# Altium PCB 20bit_40MS_ADC_DIOT.PcbDoc (part 2 of 8)
Units mm, origin at the board's own origin, x right, y up, seen from the top; angles counter-clockwise.
Board outline 222.63 x 100.1 mm, 6 copper layers (L1, L2, L3, L4, L5, L6), stack 2.522 mm thick; 616 components, 374 nets, 2097 pads, 984 vias.
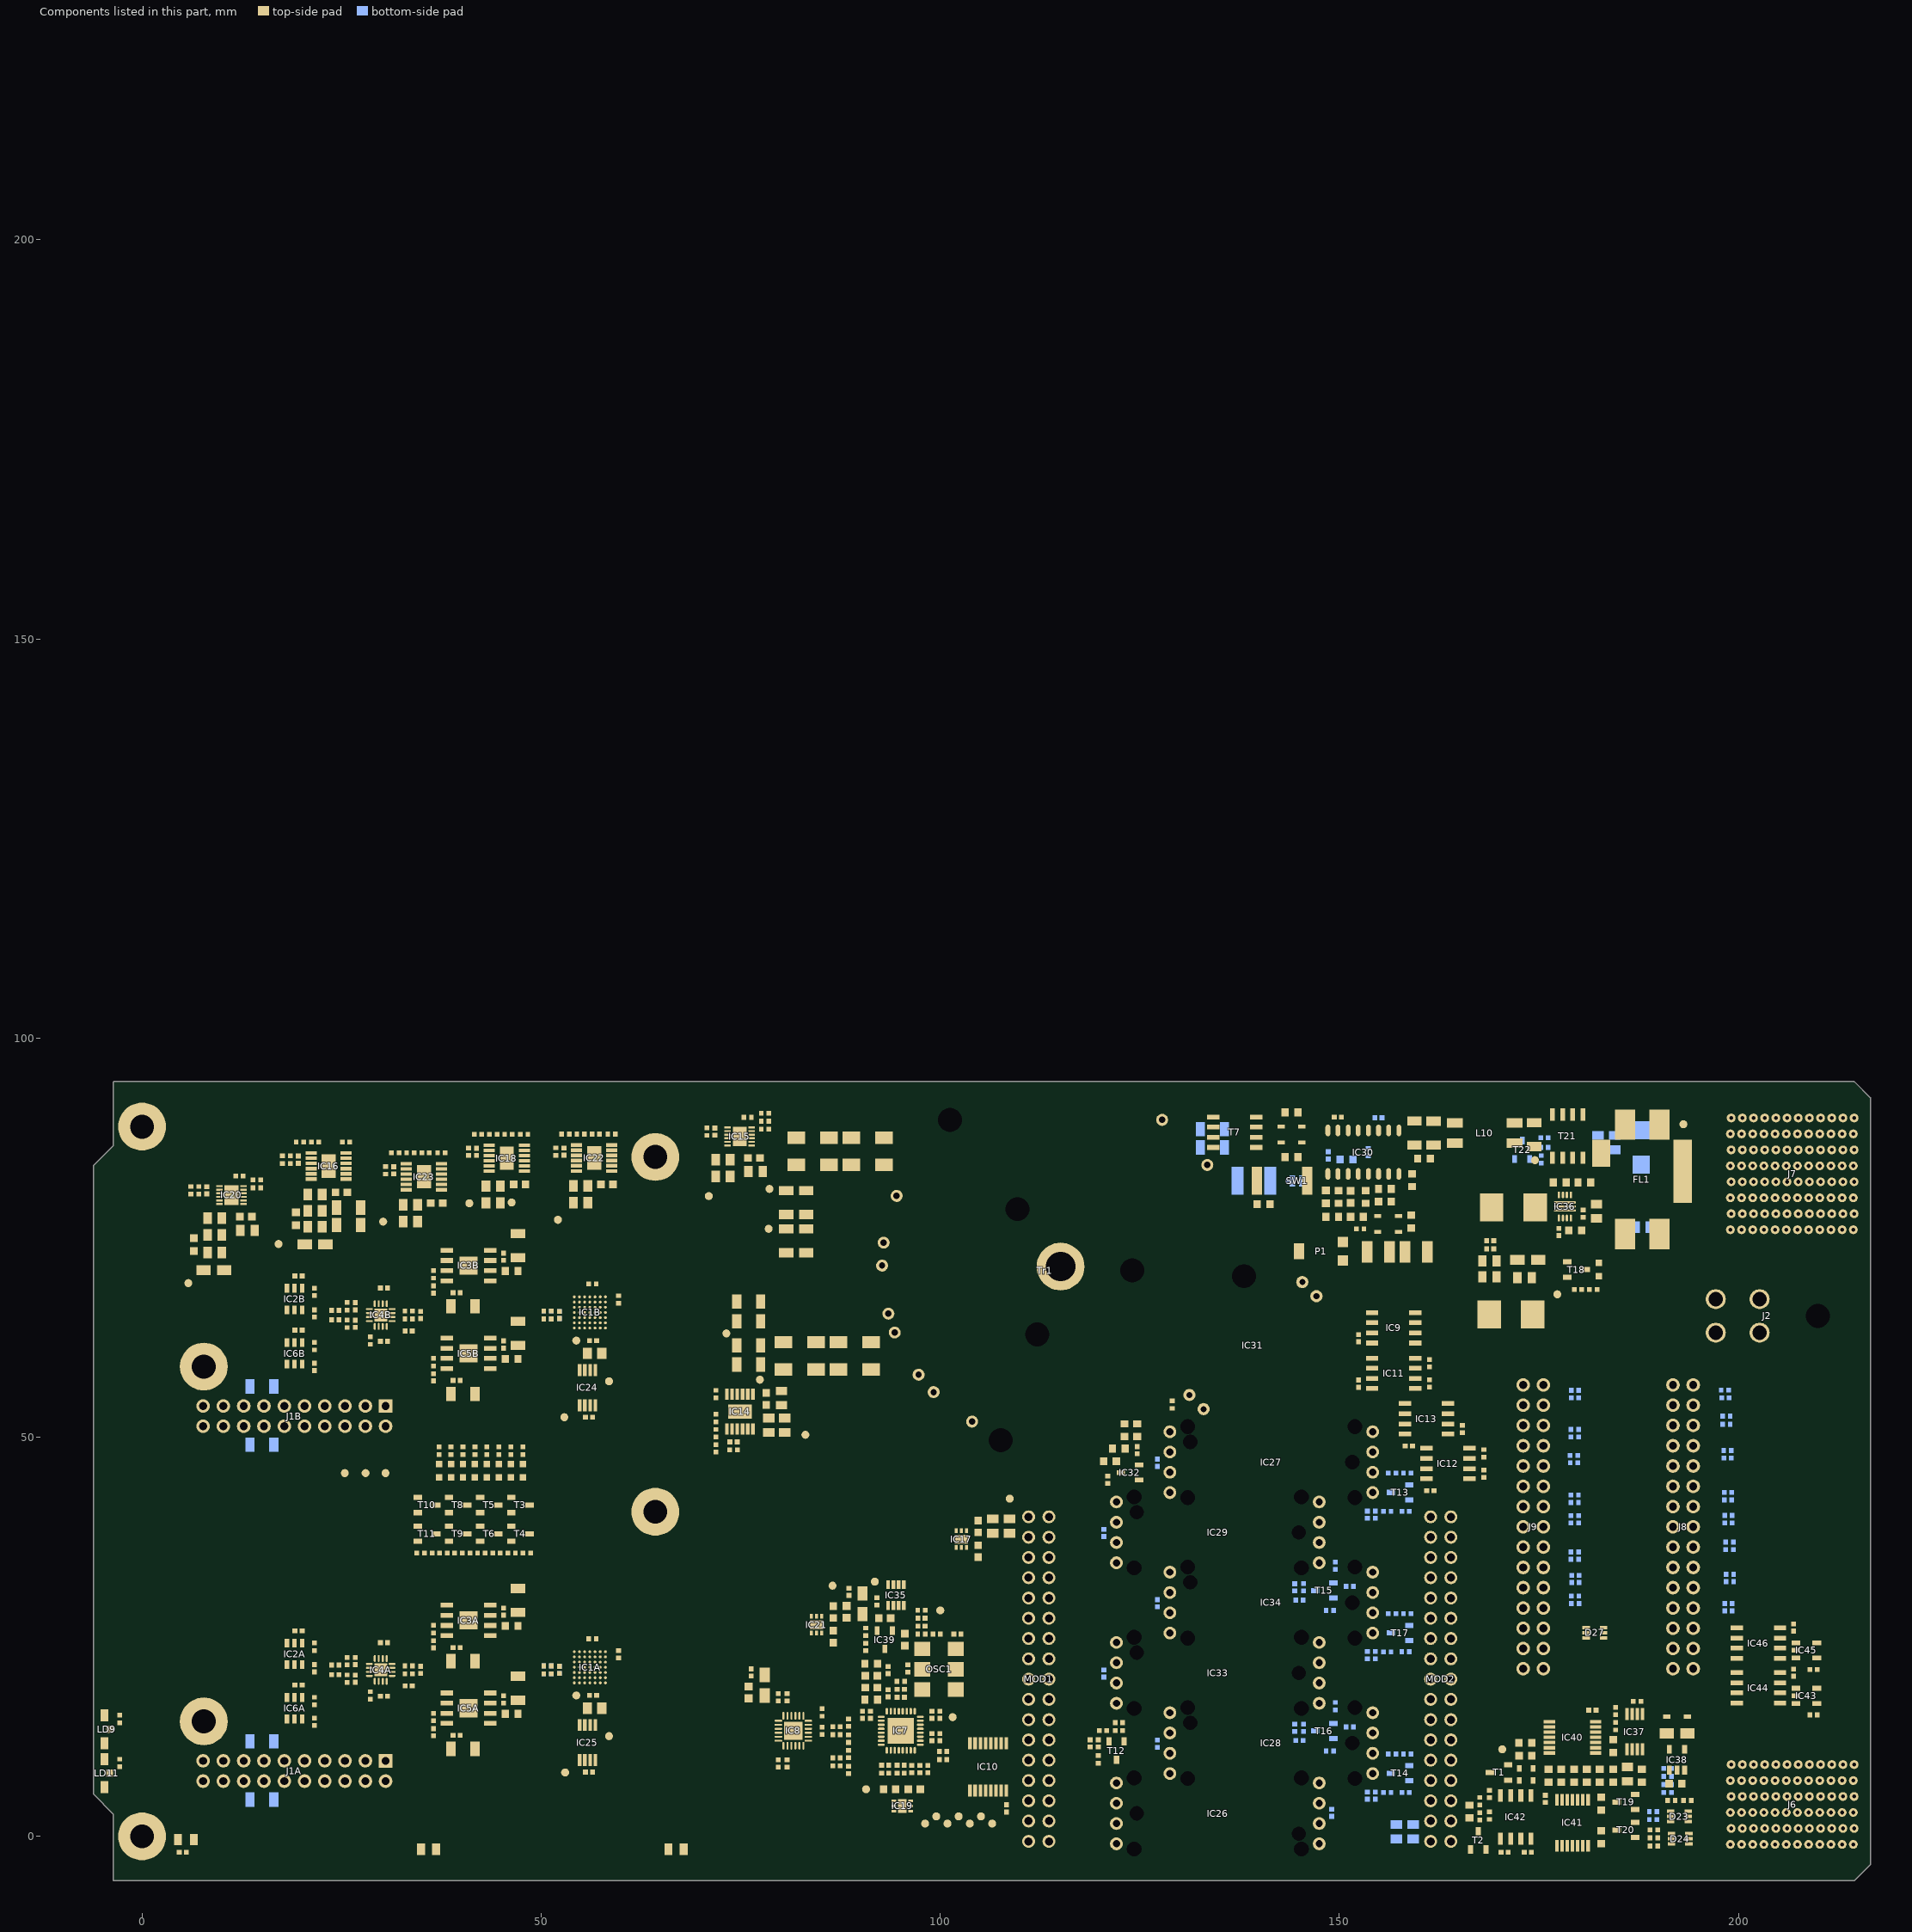
[diagram p6: the components of this part, seen from the top]

## Footprints (in the part's own frame and the unit in brackets; to place one, negate y for a bottom-side part, rotate by r counter-clockwise, add the part's x,y. Pads: shape width x height; smd on the part's side, far side on the other; paste and mask are expansions set on the pad)
3M_N2530-6002RB [mm] "30 Contacts - Straight .100\" x .100\" Low Profile Four-Wall Header"
  round 1.7 hole 1: 1(-17.78,-1.27) 2(-17.78,1.27) 3(-15.24,-1.27) 4(-15.24,1.27) 5(-12.7,-1.27) 6(-12.7,1.27) 7(-10.16,-1.27) 8(-10.16,1.27) 9(-7.62,-1.27) 10(-7.62,1.27) 11(-5.08,-1.27) 12(-5.08,1.27) 13(-2.54,-1.27) 14(-2.54,1.27) 15(0,-1.27) 16(0,1.27) 17(2.54,-1.27) 18(2.54,1.27) 19(5.08,-1.27) 20(5.08,1.27) 21(7.62,-1.27) 22(7.62,1.27) 23(10.16,-1.27) 24(10.16,1.27) 25(12.7,-1.27) 26(12.7,1.27) 27(15.24,-1.27) 28(15.24,1.27) 29(17.78,-1.27) 30(17.78,1.27)
  silkscreen extent -22.71,-4.85 22.71,4.52, body extent -22.71,-4.11 22.71,4.52, height 9.91
AMPHENOL_10052825-101LF [mm] "72 Contacts, 2mm Pitch, 6 Columns, 4 Pairs per Column, 4 Walls, Right Angle Header"
  round 1.1 hole 0.5: A1(-5,-7.65) A2(-3,-7.75) A3(-1,-7.65) A4(1,-7.75) A5(3,-7.65) A6(5,-7.75) B1(-5,-6.25) B2(-3,-6.35) B3(-1,-6.25) B4(1,-6.35) B5(3,-6.25) B6(5,-6.35) C1(-5,-4.85) C2(-3,-4.95) C3(-1,-4.85) C4(1,-4.95) C5(3,-4.85) C6(5,-4.95) D1(-5,-3.45) D2(-3,-3.55) D3(-1,-3.45) D4(1,-3.55) D5(3,-3.45) D6(5,-3.55) E1(-5,-2.05) E2(-3,-2.15) E3(-1,-2.05) E4(1,-2.15) E5(3,-2.05) E6(5,-2.15) F1(-5,-0.65) F2(-3,-0.75) F3(-1,-0.65) F4(1,-0.75) F5(3,-0.65) F6(5,-0.75) G1(-5,0.75) G2(-3,0.65) G3(-1,0.75) G4(1,0.65) G5(3,0.75) G6(5,0.65) H1(-5,2.15) H2(-3,2.05) H3(-1,2.15) H4(1,2.05) H5(3,2.15) H6(5,2.05) I1(-5,3.55) I2(-3,3.45) I3(-1,3.55) I4(1,3.45) I5(3,3.55) I6(5,3.45) J1(-5,4.95) J2(-3,4.85) J3(-1,4.95) J4(1,4.85) J5(3,4.95) J6(5,4.85) K1(-5,6.35) K2(-3,6.25) K3(-1,6.35) K4(1,6.25) K5(3,6.35) K6(5,6.25) L1(-5,7.75) L2(-3,7.65) L3(-1,7.75) L4(1,7.65) L5(3,7.75) L6(5,7.65)
  silkscreen extent -6.95,-9.45 6.95,11.85, body extent -6.95,-21.95 6.95,11.85, height 15.25
AMPHENOL_10052838-101LF [mm] "96 Contacts, 2mm Pitch, 8 Columns, 4 Pairs per Column, 4 Walls, Right Angle Header"
  round 1.1 hole 0.5: A1(-7,-7.65) A2(-5,-7.75) A3(-3,-7.65) A4(-1,-7.75) A5(1,-7.65) A6(3,-7.75) A7(5,-7.65) A8(7,-7.75) B1(-7,-6.25) B2(-5,-6.35) B3(-3,-6.25) B4(-1,-6.35) B5(1,-6.25) B6(3,-6.35) B7(5,-6.25) B8(7,-6.35) C1(-7,-4.85) C2(-5,-4.95) C3(-3,-4.85) C4(-1,-4.95) C5(1,-4.85) C6(3,-4.95) C7(5,-4.85) C8(7,-4.95) D1(-7,-3.45) D2(-5,-3.55) D3(-3,-3.45) D4(-1,-3.55) D5(1,-3.45) D6(3,-3.55) D7(5,-3.45) D8(7,-3.55) E1(-7,-2.05) E2(-5,-2.15) E3(-3,-2.05) E4(-1,-2.15) E5(1,-2.05) E6(3,-2.15) E7(5,-2.05) E8(7,-2.15) F1(-7,-0.65) F2(-5,-0.75) F3(-3,-0.65) F4(-1,-0.75) F5(1,-0.65) F6(3,-0.75) F7(5,-0.65) F8(7,-0.75) G1(-7,0.75) G2(-5,0.65) G3(-3,0.75) G4(-1,0.65) G5(1,0.75) G6(3,0.65) G7(5,0.75) G8(7,0.65) H1(-7,2.15) H2(-5,2.05) H3(-3,2.15) H4(-1,2.05) H5(1,2.15) H6(3,2.05) H7(5,2.15) H8(7,2.05) I1(-7,3.55) I2(-5,3.45) I3(-3,3.55) I4(-1,3.45) I5(1,3.55) I6(3,3.45) I7(5,3.55) I8(7,3.45) J1(-7,4.95) J2(-5,4.85) J3(-3,4.95) J4(-1,4.85) J5(1,4.95) J6(3,4.85) J7(5,4.95) J8(7,4.85) K1(-7,6.35) K2(-5,6.25) K3(-3,6.35) K4(-1,6.25) K5(1,6.35) K6(3,6.25) K7(5,6.35) K8(7,6.25) L1(-7,7.75) L2(-5,7.65) L3(-3,7.75) L4(-1,7.65) L5(1,7.75) L6(3,7.65) L7(5,7.75) L8(7,7.65)
  silkscreen extent -8.95,-9.45 8.95,11.85, body extent -8.95,-21.95 8.95,11.85, height 15.25
BGA49C65P7X7_500X500X138 [mm] "BGA, 49-Leads, Body 5.00x5.00mmx1.38mm, Pitch 0.65mm"
  round 0.35 smd: A1(-1.95,1.95) A2(-1.3,1.95) A3(-0.65,1.95) A4(0,1.95) A5(0.65,1.95) A6(1.3,1.95) A7(1.95,1.95) B1(-1.95,1.3) B2(-1.3,1.3) B3(-0.65,1.3) B4(0,1.3) B5(0.65,1.3) B6(1.3,1.3) B7(1.95,1.3) C1(-1.95,0.65) C2(-1.3,0.65) C3(-0.65,0.65) C4(0,0.65) C5(0.65,0.65) C6(1.3,0.65) C7(1.95,0.65) D1(-1.95,0) D2(-1.3,0) D3(-0.65,0) D4(0,0) D5(0.65,0) D6(1.3,0) D7(1.95,0) E1(-1.95,-0.65) E2(-1.3,-0.65) E3(-0.65,-0.65) E4(0,-0.65) E5(0.65,-0.65) E6(1.3,-0.65) E7(1.95,-0.65) F1(-1.95,-1.3) F2(-1.3,-1.3) F3(-0.65,-1.3) F4(0,-1.3) F5(0.65,-1.3) F6(1.3,-1.3) F7(1.95,-1.3) G1(-1.95,-1.95) G2(-1.3,-1.95) G3(-0.65,-1.95) G4(0,-1.95) G5(0.65,-1.95) G6(1.3,-1.95) G7(1.95,-1.95)
  silkscreen extent -3.27,-2.5 2.5,2.5, body extent -2.5,-2.5 2.5,2.5, height 1.38
BROADCOM_AFBR-390525RZ [mm] "BROADCOM AFBR-390525RZ Case, Body 30.46mm L X 10.16mm W X 6.7mm H"
  round 1.6 hole 0.9: 1(-12.7,3.81) 2(-12.7,1.27) 3(-12.7,-1.27) 4(-12.7,-3.81) 5(12.7,3.81) 6(12.7,1.27) 7(12.7,-1.27) 8(12.7,-3.81)
  round 1 hole 1.85 unplated mask+0.425: 9(-10.47,4.45) 11(-10.47,-4.45) 12(10.47,4.45) 14(10.47,-4.45)
  round 1 hole 1.8 unplated mask+0.4: 10(-10.16,0) 13(10.16,-2.54)
  silkscreen extent -15.23,-5.08 15.23,5.08, body extent -15.23,-5.08 15.23,5.08, height 6.7
C100 [mm] "1mm Diameter SMD Pad"
  round 1 smd paste-0.5: 1(0,0)
CAPC1005X55N [mm] "Capacitor, Non-Polarized, Chip; 1.00mm L X 0.50mm W X 0.70mm H, IPC Medium Density"
  rect 0.62x0.62 smd: 1(-0.45,0) 2(0.45,0)
  body extent -0.52,-0.27 0.53,0.28, height 0.55
CAPC1608X87N [mm] "Chip Capacitor, Body 1.6x0.8mm IPC Medium Density"
  rect 0.95x1 smd: 1(-0.8,0) 2(0.8,0)
  body extent -0.87,-0.47 0.88,0.48, height 0.87
CAPC1608X90N [mm] "Chip Capacitor, Body 1.6x0.8mm IPC Medium Density"
  rect 0.95x0.95 smd: 1(-0.75,0) 2(0.75,0)
  body extent -0.85,-0.45 0.85,0.45, height 0.9
CAPC2012X95N [mm] "Chip Capacitor, Body 2.0x1.25mm, IPC Medium Density"
  rect 1.1x1.45 smd: 1(-0.9,0) 2(0.9,0)
  body extent -1.05,-0.67 1.05,0.68, height 0.95
CAPC2012X135N [mm] "Chip Capacitor, Body 2.0x1.25mm, IPC Medium Density"
  rect 1.05x1.4 smd: 1(-0.9,0) 2(0.9,0)
  silkscreen extent 0,-0.58 0,0.58, body extent -1.05,-0.67 1.05,0.68, height 1.25
CAPC2012X140N [mm] "Chip Capacitor, Body 2.0x1.25mm, IPC Medium Density"
  rect 1.15x1.45 smd: 1(-0.9,0) 2(0.9,0)
  body extent -1.05,-0.67 1.05,0.68, height 1.3
CAPC3216X180N [mm] "Chip Capacitor, Body 3.2x1.6mm, IPC Medium Density"
  rect 1.15x1.8 smd: 1(-1.5,0) 2(1.5,0)
  silkscreen extent -0.55,-0.8 0.55,0.8, body extent -1.7,-0.9 1.7,0.9, height 1.8
CAPC3225X200N [mm] "Chip Capacitor, Body 3.2x2.5mm, IPC Medium Density"
  rect 1.35x2.7 smd: 1(-1.4,0) 2(1.4,0)
  silkscreen extent -0.35,-1.25 0.35,1.25, body extent -1.7,-1.35 1.5,1.35, height 2
CAPC4532X250N [mm] "Chip Capacitor, 2-Leads, Body 4.5x3.2mm, IPC Medium Density"
  rect 1.5x3.5 smd: 1(-2.05,0) 2(2.05,0)
  silkscreen extent -0.95,-1.6 0.95,1.6, body extent -2.37,-1.7 2.38,1.7, height 2.5
CAPMP3216X180N [mm] "Capacitor, Polarized, Molded  Body 3.2x1.6mm, IPC Medium Density"
  rect 1.8x1.25 smd: 1(-1.3,0) 2(1.3,0)
  silkscreen extent 0,-0.7 0,0.7, body extent -1.7,-0.9 1.7,0.9, height 1.6
DIOM5127X229N [mm] "DO-214-AC/SMA Diode, Molded Body; 5.10mm L X 2.67mm W X 2.29mm H, IPC Medium Density"
  rect 2.2x1.55 smd: 1(-2.05,0) 2(2.05,0)
  silkscreen extent -3.42,-1.4 2.65,1.45, body extent -2.67,-1.45 2.68,1.45, height 2.29
DIOM5336X265N [mm] "DO-214-AA/SMB Diode, Molded Body; 5.34mm L X 3.625mm W X 2.65mm H, IPC Medium Density"
  rect 2.3x2.15 smd: 1(-2.15,0) 2(2.15,0)
  silkscreen extent -3.92,-1.8 2.65,1.8, body extent -2.7,-1.95 2.7,1.95, height 2.4
FIL_MURATA_BNX02 [mm] "Block Type EMIFIL LC Combined Type, BNX02* Series"
  rect 3.8x2.5 smd: 1(-6.85,2.1) 2(6.85,2.1) 3(-6.85,-2.2) 4(6.85,-2.2)
  rect 7.9x2.3 smd: 4(1,-5.1)
  rect 3.4x2.3 smd: 4(3.25,5.1)
  silkscreen extent -5.95,-4.45 7.77,5.05, body extent -6.05,-4.55 6.05,4.55, height 3.1
IND_WURTH_WE-LHMI_7050 [mm] "SMD Power Inductor (We-LHMI Series), Body 7.6x6.9mm"
  rect 2.95x3.5 smd: 1(-2.725,0) 2(2.725,0)
  L1 keep-out region: 1.1,-3.45 1.1,3.45 -1.1,3.45 -1.1,-3.45
  silkscreen extent -3.8,-3.45 3.8,3.45, body extent -3.65,-3.3 3.65,3.3, height 4.8
IND_WURTH_WE-SL2 [mm] "Common Mode SMD Line Filter WE-SL2"
  rect 2x1.2 smd: 1(-3.75,1.27) 2(-3.75,-1.27) 3(3.75,-1.27) 4(3.75,1.27)
  silkscreen extent -4.75,-3.15 4.75,3.15, body extent -4.75,-3.15 4.75,3.15, height 5.3
INDC1005X55N [mm] "Chip Inductor, 2-Leads, EIA 0402, Metric 1005, Body 1x0.5mm, 0402IPC Medium Density"
  rect 0.6x0.62 smd: 1(-0.46,0) 2(0.46,0)
  body extent -0.52,-0.27 0.53,0.28, height 0.55
INDC1608X65N [mm] "Chip Inductor, 2-Leads, EIA 0603, Metric 1608, Body 1.6x0.8mm, IPC Medium Density"
  rect 1x1 smd: 1(-0.75,0) 2(0.75,0)
  body extent -0.87,-0.47 0.88,0.48, height 0.65
INDC1608X95N [mm] "Chip Inductor, 2-Leads, EIA 0603, Metric 1608, Body 1.6x0.8mm, IPC Medium Density"
  rect 0.95x1 smd: 1(-0.8,0) 2(0.8,0)
  body extent -0.87,-0.47 0.88,0.48, height 0.95
JUMPSMD0805_G50 [mm] "2 SMD Pads for Bound by Solder Drop - Equivalent Size 0805 - Gap 0.5mm"
  rect 0.475x0.45 smd paste-0.225: 1(-1.188,0) 2(1.188,0)
  rect 0.7x1.4 smd paste-0.35: 1(-0.6,0) 2(0.6,0)
  L1 region: 0.25,-0.7 0.95,-0.7 1.425,-0.225 1.425,0.225 0.95,0.7 0.25,0.7
  L1 region: -0.25,0.7 -0.95,0.7 -1.425,0.225 -1.425,-0.225 -0.95,-0.7 -0.25,-0.7
  L1 keep-out region: -0.05,0.7 0.05,0.7 0.05,-0.7 -0.05,-0.7
LED_AVAGO_HSMC-C110 [mm] "Red Chip LED, 2-Leads, Body 3.3x1.6mm, Side Emitting Package"
  rect 1.5x1 smd: 1(-1.75,0) 2(1.75,0)
  rect 0.9x0.9 smd: 3(0,-0.65)
  silkscreen extent -1.87,-1.28 0.83,1.02, body extent -1.65,-0.3 1.65,1.3, height 1
LED_AVAGO_HSME-C110 [mm] "Green Chip LED, 2-Leads, Body 3.3x1.6mm, Side Emitting Package"
  rect 1.5x1 smd: 1(-1.75,0) 2(1.75,0)
  rect 0.9x0.9 smd: 3(0,-0.65)
  silkscreen extent -1.87,-1.28 0.83,1.02, body extent -1.65,-0.3 1.65,1.3, height 1
LED_KINGBRIGHT_KP-1608CGCK [mm] "SMT Green LED, Case 0603, Body L 1.60mm x W 0.80mm x H 1.10mm"
  rect 0.8x0.8 smd: 1(-0.825,0) 2(0.825,0)
  silkscreen extent -1.82,-0.13 -1.6,0.12, body extent -0.8,-0.4 0.8,0.4, height 1.1
MOLEX_39-30-0040 [mm] "4.20mm (.165\") Pitch Mini-Fit Jr. Header, Dual Row, Right Angle with Snap-in Plastic Peg PCB Lock, 4 Circuits"
  round 2.5 hole 1.8: 1(-2.1,2.75) 2(2.1,2.75) 3(-2.1,-2.75) 4(2.1,-2.75)
  round 1 hole 3 unplated mask+1: 5(0,10.05)
  silkscreen extent -5.2,-1.24 4.8,16.28, body extent -5.2,-3.28 4.8,16.65, height 11.4
MTG300 [mm] "Non Plated Through Hole: Hole Dia.=3.0mm"
  round 0.5 hole 3 unplated mask+1.25: 1(0,0)
MTG300_600 [mm] "Plated Through Hole: Hole Dia.=3.0mm Pad Dia.=6.0mm"
  round 6 hole 3: 1(0,0)
OPI1264C [mil] "Low‐cost plastic housing"
  round 60 hole 30: 1(393.7,-49.21) 2(393.7,49.21) 3(-393.7,49.21) 4(-393.7,-49.21)
  silkscreen extent -350,-128 350,128, body extent -403,-129 404,130, height 230
OPTOISOLATOR_MODULE [mm]
  round 1.62 hole 1.02: 1(40.64,0) 2(40.64,2.54) 3(38.1,0) 4(38.1,2.54) 5(35.56,0) 6(35.56,2.54) 7(33.02,0) 8(33.02,2.54) 9(30.48,0) 10(30.48,2.54) 11(27.94,0) 12(27.94,2.54) 13(25.4,0) 14(25.4,2.54) 15(22.86,0) 16(22.86,2.54) 17(20.32,0) 18(20.32,2.54) 19(17.78,0) 20(17.78,2.54) 21(15.24,0) 22(15.24,2.54) 23(12.7,0) 24(12.7,2.54) 25(10.16,0) 26(10.16,2.54) 27(7.62,0) 28(7.62,2.54) 29(5.08,0) 30(5.08,2.54) 31(2.54,0) 32(2.54,2.54) 33(0,0) 34(0,2.54)
  body extent -1.28,-1.25 41.92,10.79, height 23.96
OSC_PERICOM_FRETHE025 [mm] "SMD Oscillator, side convave, 6 pins, 5.00x7.00mm"
  rect 2x1.8 smd: 1(-2.1,2.54) 2(-2.1,0) 3(-2.1,-2.54) 4(2.1,-2.54) 5(2.1,0) 6(2.1,2.54)
  silkscreen extent -0.75,-3.58 0.75,3.58, body extent -2.57,-3.57 2.58,3.58, height 1.55
QFN50P300X300X80_HS-17N [mm] "QFN, 16-Leads, Body 3.00x3.00mm, Pitch 0.50mm, Thermal Pad 1.60x1.60mm, IPC Medium Density"
  oval 0.85x0.25 smd: 1(-1.425,0.75) 2(-1.425,0.25) 3(-1.425,-0.25) 4(-1.425,-0.75) 9(1.425,-0.75) 10(1.425,-0.25) 11(1.425,0.25) 12(1.425,0.75)
  oval 0.25x0.85 smd: 5(-0.75,-1.425) 6(-0.25,-1.425) 7(0.25,-1.425) 8(0.75,-1.425) 13(0.75,1.425) 14(0.25,1.425) 15(-0.25,1.425) 16(-0.75,1.425)
  rect 1.6x1.6 smd: 17(0,0)
  silkscreen extent -2.47,-1.7 1.7,1.7, body extent -1.63,-1.63 1.63,1.63, height 0.8
QFN50P400X400X80_HS-25N [mm] "QFN, 24-Leads, Body 4.00x4.00mm, Pitch 0.50mm, Thermal Pad 2.30x2.30mm, IPC Medium Density"
  oval 0.95x0.25 smd: 1(-1.875,1.25) 2(-1.875,0.75) 3(-1.875,0.25) 4(-1.875,-0.25) 5(-1.875,-0.75) 6(-1.875,-1.25) 13(1.875,-1.25) 14(1.875,-0.75) 15(1.875,-0.25) 16(1.875,0.25) 17(1.875,0.75) 18(1.875,1.25)
  oval 0.25x0.95 smd: 7(-1.25,-1.875) 8(-0.75,-1.875) 9(-0.25,-1.875) 10(0.25,-1.875) 11(0.75,-1.875) 12(1.25,-1.875) 19(1.25,1.875) 20(0.75,1.875) 21(0.25,1.875) 22(-0.25,1.875) 23(-0.75,1.875) 24(-1.25,1.875)
  rect 2.3x2.3 smd: 25(0,0)
  silkscreen extent -2.97,-2.2 2.2,2.2, body extent -2.07,-2.07 2.07,2.07, height 0.8
QFN50P500X500X80-33N-S325 [mm] "QFN, 0.50mm Pitch, Square; 8 Pin X 8 Pin, 5mm X 5mm X 0.8mm H Body (w/Thermal Tab 3.25 X 3.25mm),  IPC Medium Density"
  oval 0.85x0.3 smd: 1(-2.45,1.75) 2(-2.45,1.25) 3(-2.45,0.75) 4(-2.45,0.25) 5(-2.45,-0.25) 6(-2.45,-0.75) 7(-2.45,-1.25) 8(-2.45,-1.75) 17(2.45,-1.75) 18(2.45,-1.25) 19(2.45,-0.75) 20(2.45,-0.25) 21(2.45,0.25) 22(2.45,0.75) 23(2.45,1.25) 24(2.45,1.75)
  oval 0.3x0.85 smd: 9(-1.75,-2.45) 10(-1.25,-2.45) 11(-0.75,-2.45) 12(-0.25,-2.45) 13(0.25,-2.45) 14(0.75,-2.45) 15(1.25,-2.45) 16(1.75,-2.45) 25(1.75,2.45) 26(1.25,2.45) 27(0.75,2.45) 28(0.25,2.45) 29(-0.25,2.45) 30(-0.75,2.45) 31(-1.25,2.45) 32(-1.75,2.45)
  rect 3.25x3.25 smd: 33(0,0)
  silkscreen extent -3.57,-2.5 2.5,2.5, body extent -2.5,-2.5 2.5,2.5, height 0.8
RESC1005X40N [mm] "Chip Resistor, EIA 0402, Metric 1005, Body 1.0x0.5mm, IPC Medium Density"
  rect 0.58x0.62 smd: 1(-0.47,0) 2(0.47,0)
  body extent -0.52,-0.27 0.53,0.28, height 0.4
RESC1608X55N [mm] "Chip Resistor, EIA 0603, Metric 1608, Body 1.6x0.8mm, IPC Medium Density"
  rect 0.9x1 smd: 1(-0.8,0) 2(0.8,0)
  body extent -0.87,-0.47 0.88,0.48, height 0.55
RESC2012X60N [mm] "Chip Resistor, EIA 0805, Metric 2012, Body 2.0x1.2mm, IPC Medium Density"
  rect 0.95x1.4 smd: 1(-1,0) 2(1,0)
  silkscreen extent 0,-0.55 0,0.55, body extent -1.1,-0.67 1.1,0.68, height 0.6
RESC2113X55N [mm] "Chip Resistor, EIA 0805, Metric 2113, Body 2.05x1.3mm, IPC Medium Density"
  rect 1x1.45 smd: 1(-0.95,0) 2(0.95,0)
  silkscreen extent 0,-0.55 0,0.55, body extent -1,-0.62 1,0.63, height 0.55
RESC6532X80N [mm] "Resistor, Chip; 6.5mm L X 3.25mm W X 0.80mm H, IPC Medium Density"
  rect 1.3x3.5 smd: 1(-3.15,0) 2(3.15,0)
  silkscreen extent -2.15,-1.65 2.15,1.65, body extent -3.25,-1.62 3.25,1.63, height 0.8
RTNC-40X25X15(M-083) [mm] "40x25x15mm AL=99000 Nanoperm Core"
  round 1.5 hole 0.8: 1(-22,-4) 2(-22,4) 3(20.536,-8.846) 4(22.159,-2.994) 5(22.36,-0.119) 6(21.568,5.902) 7(8.266,-20.777) 8(13.552,-17.786) 9(15.727,-15.895) 10(19.424,-11.077)
  silkscreen extent -22,-20.21 22.32,20, body extent -20,-20 20,19.89, height 15
SAMTEC_HTSW-110-23-L-D [mm] "20 Contacts, Pitch 2.54mm, Dual Row Through Mount Straight Header (Post Lead 5.84mm, Tail Lead 2.92mm, Insulator 2.54mm)"
  rect 1.7x1.7 hole 1: 1(-11.43,-1.27)
  round 1.7 hole 1: 2(-11.43,1.27) 3(-8.89,-1.27) 4(-8.89,1.27) 5(-6.35,-1.27) 6(-6.35,1.27) 7(-3.81,-1.27) 8(-3.81,1.27) 9(-1.27,-1.27) 10(-1.27,1.27) 11(1.27,-1.27) 12(1.27,1.27) 13(3.81,-1.27) 14(3.81,1.27) 15(6.35,-1.27) 16(6.35,1.27) 17(8.89,-1.27) 18(8.89,1.27) 19(11.43,-1.27) 20(11.43,1.27)
  silkscreen extent -12.7,-3.28 12.7,2.54, body extent -12.7,-2.54 12.7,2.54, height 8.38
SOD2512X110N [mm] "Small Outline Diode (SOD-323), 1.70mm W X 1.25mm L X 1.10mm H body,  IPC Medium Density"
  rect 0.9x0.5 smd: 1(-1.3,0) 2(1.3,0)
  silkscreen extent -1.63,-0.65 0.85,0.87, body extent -1.35,-0.67 1.35,0.68, height 1.1
SOD-523F [mm] "Small Outline Diode Flat Lead (SOD-523F), Body; 1.80mm L X 1mm W X 0.85mm H"
  rect 0.6x0.8 smd: 1(-0.85,0) 2(0.85,0)
  silkscreen extent -1.88,-0.5 0.2,0.52, body extent -0.91,-0.5 0.89,0.5, height 0.85
SOIC127P600X175-8N [mm] "SOIC 8, Pitch 1.27mm - Body 4x5mm, IPC Medium Density"
  rect 1.55x0.6 smd: 1(-2.7,1.905) 2(-2.7,0.635) 3(-2.7,-0.635) 4(-2.7,-1.905) 5(2.7,-1.905) 6(2.7,-0.635) 7(2.7,0.635) 8(2.7,1.905)
  silkscreen extent -2.52,-2.5 1.55,2.88, body extent -3.1,-2.5 3.1,2.5, height 1.75
SOIC127P600X175-9N-S229 [mm] "SOIC 8, 1.27mm Pitch; 8 pin, 3.90mm W X 4.90mm L X 1.75mm H body, (w/thermal tab 2.29mm X 2.29mm), IPC Medium Density"
  rect 1.55x0.6 smd: 1(-2.7,1.905) 2(-2.7,0.635) 3(-2.7,-0.635) 4(-2.7,-1.905) 5(2.7,-1.905) 6(2.7,-0.635) 7(2.7,0.635) 8(2.7,1.905)
  rect 2.29x2.29 smd: 9(0,0)
  silkscreen extent -3.32,-2.45 1.55,2.87, body extent -3.1,-2.5 3.1,2.5, height 1.75
SON45P300X300X80-13N-R175X248 [mm] "SON, 0.45mm Pitch; 12 Pin, 3.00mm W X 3.00mm L X 0.80mm H Body (w/Thermal tab 1.75 x 2.48mm), IPC Medium Density"
  rect 0.8x0.25 smd: 1(-1.5,1.125) 2(-1.5,0.675) 3(-1.5,0.225) 4(-1.5,-0.225) 5(-1.5,-0.675) 6(-1.5,-1.125) 7(1.5,-1.125) 8(1.5,-0.675) 9(1.5,-0.225) 10(1.5,0.225) 11(1.5,0.675) 12(1.5,1.125)
  rect 1.75x2.45 smd paste-0.37: 13(0,0)
  silkscreen extent -2.53,1 -2.28,1.25, body extent -1.5,-1.5 1.5,1.5, height 0.8
SON65P200X200X80-7N-R110X170 [mm] "SON, 0.65mm, Pitch; 6 Pin,2.00mm W X 2.00mm L X 0.80mm H body (W/Thermal Tab 1.1mm X 1.7mm),  IPC Medium Density"
  rect 0.6x0.35 smd: 1(-1.05,0.65) 2(-1.05,0) 3(-1.05,-0.65) 4(1.05,-0.65) 5(1.05,0) 6(1.05,0.65)
  rect 1.1x1.7 smd: 7(0,0)
  silkscreen extent -1.97,0.53 -1.73,0.78, body extent -1.05,-1.05 1.05,1.05, height 0.77
SOP65P490X109-8N [mm] "SOP, 0.65mm pitch; 8 pin,3.00mm W X 3.00mm L X 1.09mm H bodyI, PC Medium Density"
  rect 1.5x0.45 smd: 1(-2.2,0.975) 2(-2.2,0.325) 3(-2.2,-0.325) 4(-2.2,-0.975) 5(2.2,-0.975) 6(2.2,-0.325) 7(2.2,0.325) 8(2.2,0.975)
  silkscreen extent -2.83,-1.5 1.1,1.82, body extent -2.45,-1.55 2.45,1.55, height 1.09
SOP65P490X110-8N [mm] "SOP, 0.65mm pitch; 8 pin, 3.00mm W X 3.00mm L X 1.10mm H body, IPC Medium Density"
  rect 1.5x0.45 smd: 1(-2.2,0.975) 2(-2.2,0.325) 3(-2.2,-0.325) 4(-2.2,-0.975) 5(2.2,-0.975) 6(2.2,-0.325) 7(2.2,0.325) 8(2.2,0.975)
  silkscreen extent -2.82,-1.5 1.1,1.83, body extent -2.45,-1.55 2.45,1.55, height 1.1
SOP65P490X110-13N-R175X294 [mm] "SOP,0.65mm pitch;12 pin,3.00mm W X 4.039mm L X 1.10mm H body, (w/thermal tab 1.75 X 2.94 mm), IPC Medium Density"
  rect 1.4x0.45 smd: 1(-2.2,1.625) 2(-2.2,0.975) 3(-2.2,0.325) 4(-2.2,-0.325) 5(-2.2,-0.975) 6(-2.2,-1.625) 7(2.2,-1.625) 8(2.2,-0.975) 9(2.2,-0.325) 10(2.2,0.325) 11(2.2,0.975) 12(2.2,1.625)
  rect 1.75x2.94 smd: 13(0,0)
  silkscreen extent -2.77,-2 1.15,2.45, body extent -2.45,-2.07 2.45,2.07, height 1.1
SOP65P640X110-14N [mm] "SOP, 14-Leads, Body 4.4x5mm (max), Pitch 0.65mm, IPC Medium Density"
  rect 1.45x0.45 smd: 1(-2.9,1.95) 2(-2.9,1.3) 3(-2.9,0.65) 4(-2.9,0) 5(-2.9,-0.65) 6(-2.9,-1.3) 7(-2.9,-1.95) 8(2.9,-1.95) 9(2.9,-1.3) 10(2.9,-0.65) 11(2.9,0) 12(2.9,0.65) 13(2.9,1.3) 14(2.9,1.95)
  silkscreen extent -3.47,-2.5 1.82,2.82, body extent -3.12,-2.55 3.12,2.55, height 1.1
SOP65P640X110-16N [mm] "SOP, 0.65mm pitch; 16 pin, 4.40mm W X 5.00mm L X 1.10mm H body IPC Medium Density"
  rect 1.5x0.45 smd: 1(-2.95,2.275) 2(-2.95,1.625) 3(-2.95,0.975) 4(-2.95,0.325) 5(-2.95,-0.325) 6(-2.95,-0.975) 7(-2.95,-1.625) 8(-2.95,-2.275) 9(2.95,-2.275) 10(2.95,-1.625) 11(2.95,-0.975) 12(2.95,-0.325) 13(2.95,0.325) 14(2.95,0.975) 15(2.95,1.625) 16(2.95,2.275)
  silkscreen extent -3.57,-2.5 1.85,3.13, body extent -3.12,-2.55 3.12,2.55, height 1.1
SOP127P600X175-16N [mm] "SOP, 16-Leads, Body 9.90x3.90mm, Pitch 1.27mm, IPC Medium Density"
  oval 1.45x0.6 smd: 1(-2.725,4.445) 2(-2.725,3.175) 3(-2.725,1.905) 4(-2.725,0.635) 5(-2.725,-0.635) 6(-2.725,-1.905) 7(-2.725,-3.175) 8(-2.725,-4.445) 9(2.725,-4.445) 10(2.725,-3.175) 11(2.725,-1.905) 12(2.725,-0.635) 13(2.725,0.635) 14(2.725,1.905) 15(2.725,3.175) 16(2.725,4.445)
  silkscreen extent -2.85,-5 1.6,5.42, body extent -3,-5 3,5, height 1.75
SOT65P210X110-6N [mm] "SOT363, SC70-6, SOT, 0.65mm Pitch, 6 Pin, 1.25mm W X 2.00mm L X 1.10mm H, IPC Medium Density"
  rect 0.95x0.4 smd: 1(-1.1,0.65) 2(-1.1,0) 3(-1.1,-0.65) 4(1.1,-0.65) 5(1.1,0) 6(1.1,0.65)
  silkscreen extent -0.27,-1 0.27,1, body extent -1.2,-1.1 1.2,1.1, height 1.1
SOT65P280X145-8N [mm] "SOT, 0.65mm pitch; 8 pin, 1.625mm W X 2.90mm L X 1.45mm H body, IPC Medium Density"
  rect 1.1x0.45 smd: 1(-1.3,0.975) 2(-1.3,0.325) 3(-1.3,-0.325) 4(-1.3,-0.975) 5(1.3,-0.975) 6(1.3,-0.325) 7(1.3,0.325) 8(1.3,0.975)
  silkscreen extent -0.4,-1.45 0.4,1.45, body extent -1.51,-1.45 1.51,1.45, height 1.2
SOT95P230X110-3N [mm] "SOT23, 3 pin, Pitch 0.95mm - 1.3mm W X 2.9mm L X 1.1mm H, IPC Medium Density"
  rect 1x0.6 smd: 1(-1.15,0.95) 2(-1.15,-0.95) 3(1.15,0)
  silkscreen extent -0.33,-1.45 0.33,1.45, body extent -1.08,-1.5 1.25,1.5, height 1.1
SOT95P237X112-3N [mm] "SOT, 0.95mm, pitch; 3 pin,1.30mm W X 2.92mm L X 1.12mm H body, IPC Medium Density"
  rect 1.05x0.6 smd: 1(-1.15,0.95) 2(-1.15,-0.95) 3(1.15,0)
  silkscreen extent -0.3,-1.45 0.3,1.45, body extent -1.25,-1.5 1.25,1.5, height 1.1
SOT95P240X110-3N [mm] "SOT23 3-Leads, Pitch 0.95mm, Body 1.3x2.9mm, IPC Medium Density"
  rect 1.05x0.65 smd: 1(-1.15,0.95) 2(-1.15,-0.95) 3(1.15,0)
  silkscreen extent -1.51,-1.45 0.3,1.75, body extent -1.25,-1.5 1.25,1.5, height 1.1
SOT95P280X100-6N [mm] "SOT23, 0.95mm pitch; 6 pin, 1.625mm W X 2.90mm L X 1.00mm H body, IPC Medium Density"
  rect 1.1x0.55 smd: 1(-1.35,0.95) 2(-1.35,0) 3(-1.35,-0.95) 4(1.35,-0.95) 5(1.35,0) 6(1.35,0.95)
  silkscreen extent -1.77,-1.45 0.45,1.81, body extent -1.4,-1.5 1.4,1.5, height 1
SOT95P280X145-5N [mm] "SOT, 0.95mm pitch; 5 pin, 1.60mm W X 2.90mm L X 1.45mm H body, IPC Medium Density"
  rect 1.1x0.6 smd: 1(-1.3,0.95) 2(-1.3,0) 3(-1.3,-0.95) 4(1.3,-0.95) 5(1.3,0.95)
  silkscreen extent -1.72,-1.45 0.43,1.88, body extent -1.4,-1.5 1.4,1.5, height 1.45
TEXAS_RGX0011A [mm] "TEXAS Case Style (R-VQFN-HR-N11), 0.50mm Pitch, 11-pin, 2.00mm W X 3.00mm L X 1.00mm H Body"
  oval 2.75x0.3 smd: 1(0,0.5) 2(0,0) 3(0,-0.5)
  oval 0.3x0.85 smd: 4(-0.75,-1.45) 5(-0.25,-1.45) 6(0.25,-1.45) 7(0.75,-1.45) 8(0.75,1.45) 9(0.25,1.45) 10(-0.25,1.45) 11(-0.75,1.45)
  body extent -1,-1.5 1,1.5, height 1
TRIM_BOURNS_3314G-1 [mm] "Bourns 3314G-1 Single Turn 4mm Square Trimpot® Trimming Potentiometer (Top Adjust)"
  rect 1.3x1.3 smd: 1(1.15,-2.75) 3(-1.15,-2.75)
  rect 2x1.3 smd: 2(0,2.75)
  silkscreen extent -2.5,-2.24 2.5,2.24, body extent -2.5,-3.1 2.5,3.1, height 2.73
WURTH_9774010151 [mm] "5.1mm Diameter, SMT Steel Spacer Bush with Internal Thread M2.5"
  round 6 / inner round 0 / far side round 0 hole 3.7 unplated paste-2539.97: 1(0,0)
  body extent -2.55,-2.55 2.55,2.55, height 1

## Part data
B1A B1B B2 B3A B3B B4A B4B B5 B6 B7 B8 B9 B10 B11 B12 B13 B14 B15 B16 B17 B18 B19 B20 B21 B22 B23 B24 B25 B26 B27 B28 B29 B30 B31 B32 B33 B34 B35: library part SMD_PAD_D1MM, "Pad", Author="CERN DEM JLC", Component Type="Standard (No BOM)", ComponentHeight=0mm, CreateDate=10/10/2017, Family="SMD Pad", HelpURL=Undefined, LatestRevisionDate=10/10/2017, Mounted=No, PackageDescription="1mm Diameter SMD Pad", Part Description="1mm Diameter SMD Pad", Part Number=SMD_PAD_D1MM, Pin Count=1, Sense=No, SMD=Yes, Socket=No, Status=None
B36 B37 B38 B39 B40 B41: library part NON-PLATED_HOLE3.0, "Single Terminal Socket", Author="CERN DEM JLC", Component Type="Standard (No BOM)", ComponentHeight=0mm, CreateDate=5/26/2008, Family="Non Plated Hole", HelpURL=Undefined, LatestRevisionDate=5/26/2008, Mounted=No, PackageDescription="Non Plated Through Hole: Hole Dia.=3.0mm", Part Description="Non Plated Through Hole: Hole Dia.=3.0mm", Part Number=NON-PLATED_HOLE3.0, Pin Count=1, Sense=No, SMD=No, Socket=No, Status=None
BUSH1: library part WURTH_9774010151, "Threaded Bush", Manufacturer=WURTH, Manufacturer Part Number=9774010151, Author="CERN DEM HF", Component Type=Standard, ComponentHeight=1.1mm, CreateDate=11/1/2022, HelpURL=\\cern.ch\dfs\Applications\Altium\Datasheets\WURTH_9774010151.pdf, LatestRevisionDate=11/1/2022, Mounted=Yes, PackageDescription="5.1mm Diameter, SMT Steel Spacer Bush with Internal Thread M2.5", Part Description="5.1mm Diameter, SMT Steel Spacer Bush with Internal Thread M2.5", Part Number=WURTH_9774010151, Pin Count=1, PressFit=No, Sense=No, SMD=Yes, Socket=No, Status=None
C1 C5A C5B C6A C6B C8A C8B C10A C10B C13A C13B C14A C14B C17A C17B C18A C18B C19A C19B C21A C21B C24A C24B C25A C25B C31 C33 C35 C37 C38 C39 C43 C48 C50 C52 C54 C56 C57 C58 C59 C60 C82 C112 C115 C121 C122 C124 C126 C127 C128 C132 C133 C136 C141 C145 C147 C148 C149 C151 C153 C154 C156 C157 C158 C159 C164 C166 C169 C176 C177 C180 C181 C219 C220 C298 C306 C307: library part CC0402_100NF_50V_10%_X7R, "Non-polarised capacitor", Case=0402, Manufacturer=GENERIC, Manufacturer1 ComponentHeight=0.55mm, Manufacturer1 Example=MURATA, Manufacturer1 Part Number=GRM155R71H104KE14D, Tolerance=±10%, Voltage=50V, Author="CERN DEM MR", Component Type=Standard, HelpURL=\\cern.ch\dfs\Applications\Altium\Datasheets\CC0402_MURATA_GRM155R71H104KE14D.pdf, Manufacturer Part Number=CC0402_100NF_50V_10%_X7R, Mounted=Yes, Part Description="SMD Multilayer Chip Ceramic Capacitor", Part Number=CC0402_100NF_50V_10%_X7R, Pin Count=2, Sense=No, SMD=Yes, Socket=No, Status=None, TC=X7R
  C1 C158 C159 C164 C166 C169 C180 C181 C219 C220 C298 C306 C307: CreateDate=30.06.2017, LatestRevisionDate=30.06.2017
  C5A C5B C6A C6B C8A C8B C10A C10B C13A C13B C14A C14B C17A C17B C18A C18B C19A C19B C21A C21B C24A C24B C25A C25B C31 C33 C35 C37 C38 C39 C43 C48 C50 C52 C54 C56 C57 C58 C59 C60 C82 C112 C115 C121 C122 C124 C126 C127 C128 C132 C133 C136 C141 C145 C147 C148 C149 C151 C153 C154 C156 C157 C176 C177: CreateDate=6/30/2017, LatestRevisionDate=6/30/2017
C2 C11A C11B C22A C22B: library part CC0402_22PF_50V_5%_C0G, "Non-polarised capacitor", Case=0402, Manufacturer=GENERIC, Manufacturer1 ComponentHeight=0.55mm, Manufacturer1 Example=KEMET, Manufacturer1 Part Number=C0402C220J5GACTU, Tolerance=±5%, Voltage=50V, Author="CERN DEM JLC", Component Type=Standard, HelpURL="\\cern.ch\dfs\Applications\Altium\Datasheets\CC0402_C0G_KEMET_(Commercial Grade).pdf", Manufacturer Part Number=CC0402_22PF_50V_5%_C0G, Mounted=Yes, Part Description="SMD Multilayer Chip Ceramic Capacitor", Part Number=CC0402_22PF_50V_5%_C0G, Pin Count=2, Sense=No, SMD=Yes, Socket=No, Status=Preferred, TC=C0G/NP0
  C2: CreateDate=2007-12-03, LatestRevisionDate=2007-12-03
  C11A C11B C22A C22B: CreateDate=12/3/2007, LatestRevisionDate=12/3/2007
C3A C3B: library part CC0402_27PF_50V_5%_C0G, "Non-polarised capacitor", Case=0402, Manufacturer=GENERIC, Manufacturer1 ComponentHeight=0.55mm, Manufacturer1 Example=KEMET, Manufacturer1 Part Number=C0402C270J5GACTU, Tolerance=±5%, Voltage=50V, Author="CERN DEM JLC", Component Type=Standard, CreateDate=10/25/2012, HelpURL="\\cern.ch\dfs\Applications\Altium\Datasheets\CC0402_C0G_KEMET_(Commercial Grade).pdf", LatestRevisionDate=4/22/2015, Manufacturer Part Number=CC0402_27PF_50V_5%_C0G, Mounted=Yes, Part Description="SMD Multilayer Chip Ceramic Capacitor", Part Number=CC0402_27PF_50V_5%_C0G, Pin Count=2, Sense=No, SMD=Yes, Socket=No, Status=Preferred, TC=C0G/NP0
C4A C4B C32 C34 C42 C44 C49 C51 C53 C55: library part CC0402_10PF_50V_5%_C0G, "Non-polarised capacitor", Case=0402, Manufacturer=GENERIC, Manufacturer1 ComponentHeight=0.55mm, Manufacturer1 Example=KEMET, Manufacturer1 Part Number=C0402C100J5GACTU, Tolerance=±5%, Voltage=50V, Author="CERN DEM JLC", Component Type=Standard, CreateDate=12/3/2007, HelpURL="\\cern.ch\dfs\Applications\Altium\Datasheets\CC0402_C0G_KEMET_(Commercial Grade).pdf", LatestRevisionDate=4/22/2015, Manufacturer Part Number=CC0402_10PF_50V_5%_C0G, Mounted=Yes, Part Description="SMD Multilayer Chip Ceramic Capacitor", Part Number=CC0402_10PF_50V_5%_C0G, Pin Count=2, Sense=No, SMD=Yes, Socket=No, Status=Preferred, TC=C0G/NP0
C7A C7B C12A C12B C16A C16B C23A C23B C71 C72 C167 C168: library part CC1206_47UF_25V_20%_X5R, "Non-polarised capacitor", Case=1206, Manufacturer=GENERIC, Manufacturer1 ComponentHeight=1.8mm, Manufacturer1 Example=TDK, Manufacturer1 Part Number=C3216X5R1E476M160, Tolerance=±20%, Voltage=25V, Author="CERN DEM JLC", Component Type=Standard, CreateDate=11/20/2013, HelpURL=\\cern.ch\dfs\Applications\Altium\Datasheets\CC1206_X5R_TDK_C.pdf, LatestRevisionDate=3/14/2017, Manufacturer Part Number=CC1206_47UF_25V_20%_X5R, Mounted=Yes, Part Description="SMD Multilayer Chip Ceramic Capacitor", Part Number=CC1206_47UF_25V_20%_X5R, Pin Count=2, Sense=No, SMD=Yes, Socket=No, Status=None, TC=X5R
C9A C9B C20A C20B: library part CC0402_82PF_25V_1%_C0G_KEMET_HiQ-CBR, "Non-polarised capacitor", Case=0402, Manufacturer=KEMET, Manufacturer Part Number=CBR04C820F3GAC, Tolerance=±1%, Voltage=25V, Author="CERN DEM MR", Component Type=Standard, ComponentHeight=0.55mm, CreateDate=11/17/2017, HelpURL=\\cern.ch\dfs\Applications\Altium\Datasheets\CC0402_C0G_KEMET_HiQ-CBR.pdf, LatestRevisionDate=11/21/2017, Mounted=Yes, Part Description="High Q and low ESR, SMD Multilayer Chip Ceramic Capacitor, HiQ-CBR Series", Part Number=CC0402_82PF_25V_1%_C0G_KEMET_HiQ-CBR, Pin Count=2, Sense=No, SMD=Yes, Socket=No, Status="Not Recommended", TC=C0G/NP0
C15A C15B: library part CC0402_1NF_50V_10%_X7R, "Non-polarised capacitor", Case=0402, Manufacturer=GENERIC, Manufacturer1 ComponentHeight=0.55mm, Manufacturer1 Example=PHYCOMP, Manufacturer1 Part Number=223858715623, Tolerance=±10%, Voltage=50V, Author="CERN DEM JLC", Component Type=Standard, CreateDate=12/3/2007, HelpURL=\\cern.ch\dfs\Applications\Altium\Datasheets\CC0402_X7R_PHYCOMP.pdf, LatestRevisionDate=12/3/2007, Manufacturer Part Number=CC0402_1NF_50V_10%_X7R, Mounted=Yes, Part Description="SMD Multilayer Chip Ceramic Capacitor", Part Number=CC0402_1NF_50V_10%_X7R, Pin Count=2, Sense=No, SMD=Yes, Socket=No, Status="Not Recommended", TC=X7R
C26 C27 C28 C29 C65 C70 C84 C89 C108 C111 C114: library part CC0402_10NF_16V_10%_X7R, "Non-polarised capacitor", Case=0402, Manufacturer=GENERIC, Manufacturer1 ComponentHeight=0.55mm, Manufacturer1 Example=PHYCOMP, Manufacturer1 Part Number=223878715636, Tolerance=±10%, Voltage=16V, Author="CERN DEM JLC", Component Type=Standard, CreateDate=12/3/2007, HelpURL=\\cern.ch\dfs\Applications\Altium\Datasheets\CC0402_X7R_PHYCOMP.pdf, LatestRevisionDate=12/3/2007, Manufacturer Part Number=CC0402_10NF_16V_10%_X7R, Mounted=Yes, Part Description="SMD Multilayer Chip Ceramic Capacitor", Part Number=CC0402_10NF_16V_10%_X7R, Pin Count=2, Sense=No, SMD=Yes, Socket=No, Status="Not Recommended", TC=X7R
C30: library part CC0402_390PF_50V_1%_C0G_MURATA_GCM1555C1H391FA16, "Non-polarised capacitor", Case=0402, Manufacturer=MURATA, Manufacturer Part Number=GCM1555C1H391FA16, Tolerance=±1%, Voltage=50V, Author="CERN DEM BC", Component Type=Standard, ComponentHeight=0.55mm, CreateDate=9/2/2020, HelpURL=\\cern.ch\dfs\Applications\Altium\Datasheets\CC0402_MURATA_GCM1555C1H391FA16.pdf, LatestRevisionDate=9/2/2020, Mounted=Yes, Part Description="Chip Multilayer Ceramic Capacitor for Automotive", Part Number=CC0402_390PF_50V_1%_C0G_MURATA_GCM1555C1H391FA16, Pin Count=2, Sense=No, SMD=Yes, Socket=No, Status=None, TC=C0G/NP0
C36 C163 C175: library part CTE3216-18_10UF_16V_20%_AVX_TCJ, "Polarised capacitor", Case=A, Manufacturer=AVX, Manufacturer Part Number=TCJA106M016R0200, Tolerance=±20%, Voltage=16V, Author="CERN DEM JLC", Component Type=Standard, ComponentHeight=1.8mm, HelpURL=\\cern.ch\dfs\Applications\Altium\Datasheets\CTE_AVX_TCJ.pdf, Mounted=Yes, Part Description="ESR 0R200 Tantalum Solid Electrolytic Chip Capacitor with Conductive Polymer Electrode", Part Number=CTE3216-18_10UF_16V_20%_AVX_TCJ, Pin Count=2, Sense=No, SMD=Yes, Socket=No, Status=Preferred
  C36 C175: CreateDate=3/29/2012, LatestRevisionDate=3/29/2012
  C163: CreateDate=29.03.2012, LatestRevisionDate=29.03.2012
C40 C41: library part CC0402_470NF_16V_10%_X5R, "Non-polarised capacitor", Case=0402, Manufacturer=GENERIC, Manufacturer1 ComponentHeight=0.55mm, Manufacturer1 Example=TDK, Manufacturer1 Part Number=C1005X5R1C105KT, Tolerance=±10%, Voltage=16V, Author="CERN DEM JLC", Component Type=Standard, CreateDate=10/25/2012, HelpURL=\\cern.ch\dfs\Applications\Altium\Datasheets\CC0402_X5R_TDK_C.pdf, LatestRevisionDate=10/25/2012, Manufacturer Part Number=CC0402_470NF_16V_10%_X5R, Mounted=Yes, Part Description="SMD Multilayer Chip Ceramic Capacitor", Part Number=CC0402_470NF_16V_10%_X5R, Pin Count=2, Sense=No, SMD=Yes, Socket=No, Status=Preferred, TC=X5R
C45 C46: library part CC0603_1NF_50V_1%_NP0, "Non-polarised capacitor", Case=0603, Manufacturer=GENERIC, Manufacturer1 ComponentHeight=0.9mm, Manufacturer1 Example=AVX, Manufacturer1 Part Number=06035A102FAT2A, Tolerance=±1%, Voltage=50V, Author="CERN DEM JLC", Component Type=Standard, CreateDate=6/15/2017, HelpURL=\\cern.ch\dfs\Applications\Altium\Datasheets\CC0603_C0G_AVX.pdf, LatestRevisionDate=6/15/2017, Manufacturer Part Number=CC0603_1NF_50V_1%_NP0, Mounted=Yes, Part Description="SMD Multilayer Chip Ceramic Capacitor", Part Number=CC0603_1NF_50V_1%_NP0, Pin Count=2, Sense=No, SMD=Yes, Socket=No, Status=None, TC=C0G/NP0
C47: library part CC0402_27NF_25V_10%_X7R, "Non-polarised capacitor", Case=0402, Manufacturer=GENERIC, Manufacturer1 ComponentHeight=0.55mm, Manufacturer1 Example=KEMET, Manufacturer1 Part Number=C0402C273K3RACTU, Tolerance=±10%, Voltage=25V, Author="CERN DEM JLC", Component Type=Standard, CreateDate=3/9/2017, HelpURL=\\cern.ch\dfs\Applications\Altium\Datasheets\CC0402_X7R_KEMET.pdf, LatestRevisionDate=3/9/2017, Manufacturer Part Number=CC0402_27NF_25V_10%_X7R, Mounted=Yes, Part Description="SMD Multilayer Chip Ceramic Capacitor", Part Number=CC0402_27NF_25V_10%_X7R, Pin Count=2, Sense=No, SMD=Yes, Socket=No, Status=Preferred, TC=X7R
C61 C66 C102 C160 C161 C162 C165 C179: library part CC0805_22UF_16V_10%_X5R, "Non-polarised capacitor", Case=0805, Manufacturer=GENERIC, Manufacturer1 ComponentHeight=1.35mm, Manufacturer1 Example=TDK, Manufacturer1 Part Number=C2012X5R1C226KT, Tolerance=±10%, Voltage=16V, Author="CERN DEM JLC", Component Type=Standard, CreateDate=25.10.2012, HelpURL=\\cern.ch\dfs\Applications\Altium\Datasheets\CC0805_X5R_TDK_C.pdf, LatestRevisionDate=25.10.2012, Manufacturer Part Number=CC0805_22UF_16V_10%_X5R, Mounted=Yes, Part Description="SMD Multilayer Chip Ceramic Capacitor", Part Number=CC0805_22UF_16V_10%_X5R, Pin Count=2, Sense=No, SMD=Yes, Socket=No, Status=Preferred, TC=X5R
C62 C67 C75 C80 C81 C83 C87 C88 C97 C101 C103 C104 C105 C155 C178: library part CC0603_4.7UF_25V_10%_X5R, "Non-polarised capacitor", Case=0603, Manufacturer=GENERIC, Manufacturer1 ComponentHeight=0.95mm, Manufacturer1 Example=MURATA, Manufacturer1 Part Number=GRM188R61E475KE11D, Tolerance=±10%, Voltage=25V, Author="CERN DEM JLC", Component Type=Standard, CreateDate=11/10/2014, HelpURL=\\cern.ch\dfs\Applications\Altium\Datasheets\CC0603_MURATA_GRM188R61E475KE11D.pdf, LatestRevisionDate=11/10/2014, Manufacturer Part Number=CC0603_4.7UF_25V_10%_X5R, Mounted=Yes, Part Description="SMD Multilayer Chip Ceramic Capacitor", Part Number=CC0603_4.7UF_25V_10%_X5R, Pin Count=2, Sense=No, SMD=Yes, Socket=No, Status=None, TC=X5R
C63 C64 C68 C69 C77 C78 C79 C85 C86 C98 C99 C100 C106 C107 C109 C110 C117 C118 C119 C120 C170 C171 C172: library part CC0805_10UF_25V_10%_X5R, "Non-polarised capacitor", Case=0805, Manufacturer=GENERIC, Manufacturer1 ComponentHeight=0.95mm, Manufacturer1 Example=MURATA, Manufacturer1 Part Number=GRM219R61E106KA12D, Tolerance=±10%, Voltage=25V, Author="CERN DEM JLC", Component Type=Standard, HelpURL=\\cern.ch\dfs\Applications\Altium\Datasheets\CC0805_X5R_MURATA_GRM.pdf, Manufacturer Part Number=CC0805_10UF_25V_10%_X5R, Mounted=Yes, Part Description="SMD Multilayer Chip Ceramic Capacitor", Part Number=CC0805_10UF_25V_10%_X5R, Pin Count=2, Sense=No, SMD=Yes, Socket=No, Status=Preferred, TC=X5R
  C63 C64 C68 C69 C77 C78 C79 C85 C86 C98 C99 C100 C106 C107 C109 C110 C117 C118 C119 C120: CreateDate=10/25/2012, LatestRevisionDate=9/6/2016
  C170 C171 C172: CreateDate=25.10.2012, LatestRevisionDate=06.09.2016
C73 C74 C90 C91 C92 C93 C94 C95 C131 C183A C183B C184A C184B: library part CC1206_47UF_25V_20%_X5R, "Non-polarised capacitor", Case=1206, Manufacturer=TDK, Manufacturer Part Number=C3216X5R1E476M160AC, Tolerance=±20%, Voltage=25V, Author="CERN DEM JLC", Component Type=Standard, ComponentHeight=1.8mm, CreateDate=2013-11-20, HelpURL=\\cern.ch\dfs\Applications\Altium\Datasheets\CC1206_X5R_TDK_C.pdf, LatestRevisionDate=2013-11-20, Mounted=Yes, Part Description="SMD Multilayer Chip Ceramic Capacitor", Part Number=CC1206_47UF_25V_20%_X5R, Pin Count=2, SMD=Yes, Socket=No, Status=None, Table="Capacitors SMD", TC=X5R
C76 C96: library part CTE3216-18_10UF_10V_10%_LESR1800, "Polarised capacitor", Case=A, Manufacturer=GENERIC, Manufacturer1 ComponentHeight=1.8mm, Manufacturer1 Example=AVX, Manufacturer1 Part Number=TPSA106K010R1800, Tolerance=±10%, Voltage=10V, Author="CERN DEM JLC", Component Type=Standard, CreateDate=5/5/2008, HelpURL=\\cern.ch\dfs\Applications\Altium\Datasheets\CTE-LESR_AVX_TPS.pdf, LatestRevisionDate=1/20/2009, Manufacturer Part Number=CTE3216-18_10UF_10V_10%_LESR1800, Mounted=Yes, Part Description="Low ESR 1R8 Solid Tantalum Chip Capacitor", Part Number=CTE3216-18_10UF_10V_10%_LESR1800, Pin Count=2, Sense=No, SMD=Yes, Socket=No, Status=Preferred
C113 C116: library part CC0805_47UF_6.3V_10%_X5R, "Non-polarised capacitor", Case=0805, Manufacturer=GENERIC, Manufacturer1 ComponentHeight=1.4mm, Manufacturer1 Example=KEMET, Manufacturer1 Part Number=C0805C476K9PAC, Tolerance=±10%, Voltage=6.3V, Author="CERN DEM HF", Component Type=Standard, CreateDate=7/10/2023, HelpURL=\\cern.ch\dfs\Applications\Altium\Datasheets\CC0805_X5R_KEMET.pdf, LatestRevisionDate=7/10/2023, Manufacturer Part Number=CC0805_47UF_6.3V_10%_X5R, Mounted=Yes, Part Description="SMD Multilayer Chip Ceramic Capacitor", Part Number=CC0805_47UF_6.3V_10%_X5R, Pin Count=2, Sense=No, SMD=Yes, Socket=No, Status=Preferred, TC=X5R
C123 C125 C129 C134 C150 C152: library part CC0402_1UF_16V_10%_X5R, "Non-polarised capacitor", Case=0402, Manufacturer=GENERIC, Manufacturer1 ComponentHeight=0.55mm, Manufacturer1 Example=TDK, Manufacturer1 Part Number=C1005X5R1C105KT, Tolerance=±10%, Voltage=16V, Author="CERN DEM JLC", Component Type=Standard, CreateDate=10/25/2012, HelpURL=\\cern.ch\dfs\Applications\Altium\Datasheets\CC0402_X5R_TDK_C.pdf, LatestRevisionDate=10/25/2012, Manufacturer Part Number=CC0402_1UF_16V_10%_X5R, Mounted=Yes, Part Description="SMD Multilayer Chip Ceramic Capacitor", Part Number=CC0402_1UF_16V_10%_X5R, Pin Count=2, Sense=No, SMD=Yes, Socket=No, Status=Preferred, TC=X5R
C130 C135: library part CC1206_10UF_25V_10%_X7R, "Non-polarised capacitor", Case=1206, Manufacturer=GENERIC, Manufacturer1 ComponentHeight=1.8mm, Manufacturer1 Example=KEMET, Manufacturer1 Part Number=C1206C106K4RACTU, Manufacturer Part Number=CC1206_10uF_25V_10%_X7R, Tolerance=±10%, Voltage=25V, Author="CERN DEM JLC", Component Type=Standard, CreateDate=2012-09-12, HelpURL=\\cern.ch\dfs\Applications\Altium\Datasheets\CC1206_X7R_KEMET.pdf, LatestRevisionDate=2012-09-12, Mounted=Yes, Part Description="SMD Multilayer Chip Ceramic Capacitor", Part Number=CC1206_10UF_25V_10%_X7R, Pin Count=2, SMD=Yes, Socket=No, Status=Preferred, Table="Capacitors SMD", TC=X7R
C137: library part CC1812_100NF_500V_10%_X7R, "Non-polarised capacitor", Case=1812, Manufacturer=GENERIC, Manufacturer1 ComponentHeight=2.5mm, Manufacturer1 Example=SYFER, Manufacturer1 Part Number=1812Y5000104KXB, Tolerance=±10%, Voltage=500V, Author="CERN DEM JMW", Component Type=Standard, CreateDate=1/23/2009, HelpURL=\\cern.ch\dfs\Applications\Altium\Datasheets\CC1812_X7R_SYFER.pdf, LatestRevisionDate=6/7/2011, Manufacturer Part Number=CC1812_100NF_500V_10%_X7R, Mounted=Yes, Part Description="SMD Multilayer Chip Ceramic Capacitor", Part Number=CC1812_100NF_500V_10%_X7R, Pin Count=2, Sense=No, SMD=Yes, Socket=No, Status=None, TC=X7R
C138 C146: library part CC0603_270PF_50V_5%_NP0, "Non-polarised capacitor", Case=0603, Manufacturer=GENERIC, Manufacturer1 ComponentHeight=0.87mm, Manufacturer1 Example=PHYCOMP, Manufacturer1 Part Number=223886715271, Tolerance=±5%, Voltage=50V, Author="CERN DEM JLC", Component Type=Standard, CreateDate=12/3/2007, HelpURL=\\cern.ch\dfs\Applications\Altium\Datasheets\CC0603_NP0_PHYCOMP.pdf, LatestRevisionDate=12/3/2007, Manufacturer Part Number=CC0603_270PF_50V_5%_NP0, Mounted=Yes, Part Description="SMD Multilayer Chip Ceramic Capacitor", Part Number=CC0603_270PF_50V_5%_NP0, Pin Count=2, Sense=No, SMD=Yes, Socket=No, Status=Preferred, TC=C0G/NP0
C139 C140: library part CMIC1210_220PF_100V_0.5PF_CORNELL_MC12F, "Non-polarised capacitor", Case=1210, Manufacturer="CORNELL DUBILIER", Manufacturer Part Number=MC12FA221D-F, Tolerance=±0.5pF, Voltage=100V, Author="CERN DEM JLC", Component Type=Standard, ComponentHeight=2mm, CreateDate=8/10/2011, HelpURL=\\cern.ch\dfs\Applications\Altium\Datasheets\CMIC1210_CORNELL_MC.pdf, LatestRevisionDate=8/10/2011, Mounted=Yes, Part Description="SMD RF Multilayer Mica Capacitor (Type MC)", Part Number=CMIC1210_220PF_100V_0.5PF_CORNELL_MC12F, Pin Count=2, Sense=No, SMD=Yes, Socket=No, Status="Not Recommended"
C142: library part CC0603_1NF_50V_5%_NP0, "Non-polarised capacitor", Case=0603, Manufacturer=GENERIC, Manufacturer1 ComponentHeight=0.9mm, Manufacturer1 Example="YAGEO PHYCOMP", Manufacturer1 Part Number=CC0603JRNPO9BN102, Tolerance=±5%, Voltage=50V, Author="CERN DEM JLC", Component Type=Standard, CreateDate=10/22/2012, HelpURL=\\cern.ch\dfs\Applications\Altium\Datasheets\CC0805_NP0_PHYCOMP_16VTO50V.pdf, LatestRevisionDate=10/22/2012, Manufacturer Part Number=CC0603_1NF_50V_5%_NP0, Mounted=Yes, Part Description="SMD Multilayer Chip Ceramic Capacitor", Part Number=CC0603_1NF_50V_5%_NP0, Pin Count=2, Sense=No, SMD=Yes, Socket=No, Status=Preferred, TC=C0G/NP0
C143 C144 C173 C182: library part CC0603_1UF_25V_10%_X7R, "Non-polarised capacitor", Case=0603, Manufacturer=GENERIC, Manufacturer1 ComponentHeight=0.9mm, Manufacturer1 Example=MURATA, Manufacturer1 Part Number=GRM188R71E105KA12D, Tolerance=±10%, Voltage=25V, Author="CERN DEM JLC", Component Type=Standard, HelpURL=\\cern.ch\dfs\Applications\Altium\Datasheets\CC0603_X7R_MURATA.pdf, Manufacturer Part Number=CC0603_1UF_25V_10%_X7R, Mounted=Yes, Part Description="SMD Multilayer Chip Ceramic Capacitor", Part Number=CC0603_1UF_25V_10%_X7R, Pin Count=2, Sense=No, SMD=Yes, Socket=No, Status=None, TC=X7R
  C143 C144: CreateDate=1/18/2011, LatestRevisionDate=1/18/2011
  C173 C182: CreateDate=18.01.2011, LatestRevisionDate=18.01.2011
C174: library part CTE3216-18_4.7UF_10V_10%_AVX_TPSA475K010T1400, "Polarised capacitor", Case=A, Manufacturer=AVX, Manufacturer Part Number=TPSA475K010T1400, Tolerance=±10%, Voltage=10V, Author="CERN DEM JLC", Component Type=Standard, ComponentHeight=1.8mm, CreateDate=23.01.2018, HelpURL=\\cern.ch\dfs\Applications\Altium\Datasheets\CTE-LESR_AVX_TPS-AUTO.pdf, LatestRevisionDate=23.01.2018, Mounted=Yes, Part Description="Low ESR 1R4 Automotive Solid Tantalum Chip Capacitor", Part Number=CTE3216-18_4.7UF_10V_10%_AVX_TPSA475K010T1400, Pin Count=2, Sense=No, SMD=Yes, Socket=No, Status=Preferred
D1 D4 D7 D8: "Schottky Diode", Case=SOD-323, Manufacturer=INFINEON, Power=750mA, Voltage=40V, Author="CERN DEM JLC", Bonding=No, Component Type=Standard, ComponentHeight=1.1mm, CreateDate=11/12/2014, Device=BAT165, HelpURL=\\cern.ch\dfs\Applications\Altium\Datasheets\BAT165.pdf, LatestRevisionDate=11/12/2014, Manufacturer Part Number=BAT165, Mounted=Yes, PackageDescription="Small Outline Diode (SOD-323), 1.70mm W X 1.25mm L X 1.10mm H body,  IPC Medium Density", Part Description="Medium Power AF Schottky Diode", Part Number=BAT165, Pin Count=2, PressFit=No, Sense=No, SMD=Yes, Socket=No
D2 D3 D5 D6 D13 D14 D15 D16: "Schottky Diode", Case=DO-214AC, Manufacturer="VISHAY GENERAL SEMICONDUCTOR", Power=1A, Voltage=60V, Author="CERN DEM JLC", Bonding=No, Component Type=Standard, ComponentHeight=2.29mm, CreateDate=7/15/2008, Device=SS16, HelpURL=\\cern.ch\dfs\Applications\Altium\Datasheets\SS16.pdf, LatestRevisionDate=8/23/2010, Manufacturer Part Number=SS16, Mounted=Yes, PackageDescription="DO-214-AC/SMA Diode, Molded Body; 5.10mm L X 2.67mm W X 2.29mm H, IPC Medium Density", Part Description="Surface Mount Schottky Barrier Rectifier", Part Number=SS16, Pin Count=2, PressFit=No, Sense=No, SMD=Yes, Socket=No
D21: "Zener Diode", Case=DO-214AA, Manufacturer="FAIRCHILD SEMICONDUCTOR", Power=600W, Voltage=12V, Author="CERN DEM JLC", Bonding=No, Component Type=Standard, ComponentHeight=2.65mm, CreateDate=10.04.2013, Device=SMBJ12A, HelpURL=\\cern.ch\dfs\Applications\Altium\Datasheets\SMBJ.pdf, LatestRevisionDate=10.04.2013, Manufacturer Part Number=SMBJ12A, Mounted=Yes, PackageDescription="DO-214-AA/SMB Diode, Molded Body; 5.34mm L X 3.625mm W X 2.65mm H, IPC Medium Density", Part Description="Uni-Directional Transient Voltage Suppressor Diode", Part Number=SMBJ12A, Pin Count=2, PressFit=No, Sense=No, SMD=Yes, Socket=No
D22: "Schottky Diode", Case=SOD323, Manufacturer=INFINEON, Power=750mA, Voltage=40V, Author="CERN DEM JLC", Bonding=No, Component Type=Standard, ComponentHeight=1.1mm, CreateDate=12.11.2014, Device=BAT165, HelpURL=\\cern.ch\dfs\Applications\Altium\Datasheets\BAT165.pdf, LatestRevisionDate=12.11.2014, Manufacturer Part Number=BAT165, Mounted=Yes, PackageDescription="Small Outline Diode (SOD-323), 1.70mm W X 1.25mm L X 1.10mm H body,  IPC Medium Density", Part Description="Medium Power AF Schottky Diode", Part Number=BAT165, Pin Count=2, PressFit=No, Sense=No, SMD=Yes, Socket=No
D23 D24 D27: "Fivefold ESD Protection Diode Arrays", Case=SOT363, Manufacturer=NEXPERIA, Power=200W, Voltage=3.3V, Author="CERN DEM WB", Bonding=No, Component Type=Standard, ComponentHeight=1.1mm, CreateDate=05.07.2021, Device=PESD3V3L5UY, HelpURL=\\cern.ch\dfs\Applications\Altium\Datasheets\PESD3V3L5UY.pdf, LatestRevisionDate=05.07.2021, Manufacturer Part Number=PESD3V3L5UY, Mounted=Yes, PackageDescription="SOT363, SC-88, 0.65mm Pitch; 6 Pin, 1.25mm W X 2.00mm L X 1.10mm H body, IPC Medium Density", Part Description="Fivefold ESD Protection Diode Arrays (30kV)", Part Number=PESD3V3L5UY, Pin Count=6, PressFit=No, Sense=No, SMD=Yes, Socket=No
D25 D26: "Schottky Diode", Case=SOD-523F, Manufacturer=COMCHIP, Power=500mA, Voltage=20V, Author="CERN DEM HF", Bonding=No, Component Type=Standard, ComponentHeight=1mm, CreateDate=13.10.2023, Device=CDBU0520-HF, HelpURL=\\cern.ch\dfs\Applications\Altium\Datasheets\CDBU0520-HF.pdf, LatestRevisionDate=13.10.2023, Manufacturer Part Number=CDBU0520-HF, Mounted=Yes, PackageDescription="Small Outline Diode Flat Lead (SOD-523F), Body; 1.80mm L X 1mm W X 0.85mm H", Part Description="20V Surface mount Schottky Barrier Diode", Part Number=CDBU0520-HF, Pin Count=2, PressFit=No, Sense=No, SMD=Yes, Socket=No
FL1: library part FIL_MURATA_BNX022-01L, "Block Type EMIFIL (LC Combined)", Manufacturer=MURATA, Manufacturer Part Number=BNX022-01L, Resistance=0.5R, Author="CERN DEM JLC", Component Type=Standard, ComponentHeight=3.3mm, CreateDate=10.10.2012, HelpURL=\\cern.ch\dfs\Applications\Altium\Datasheets\FIL_MURATA_BNX022-01L.pdf, LatestRevisionDate=10.10.2012, Mounted=Yes, Part Description="Block Type EMIFIL (LC Combined) SMD Type, BNX02* Series", Part Number=FIL_MURATA_BNX022-01L, Pin Count=2, Sense=No, SMD=Yes, Socket=No, Status=None
IC1A IC1B: "20-Bit, 40 MSPS, Differential SAR ADC", Case=BGA, Manufacturer="Analog Devices", Author="Michal Beldyga", Component Type=Standard, CreateDate=1/31/2025, Device=AD4080BBCZ, LastRevision=1/31/2025, Manufacturer Part Number=AD4080BBCZ, PackageDescription="BGA, 49-Leads, Body 5.00x5.00mmx1.38mm, Pitch 0.65mm", Part Description="20-Bit, 40 MSPS, Differential SAR ADC", Part Number=AD4080BBCZ, Pin Count=49, Status=Active
IC2A IC2B IC6A IC6B: "Rail-to-Rail Output 215MHz, 1.1nV/√Hz Op Amp/SAR ADC Driver", Case=SOT23-6, Manufacturer="Linear Technology", Author="Michal Beldyga", Component Type=Standard, CreateDate=1/31/2025, Device=LT6236HS6#TRMPBF, LastRevision=1/31/2025, Manufacturer Part Number=LT6236HS6#TRMPBF, PackageDescription="SOT23, 0.95mm pitch; 6 pin, 1.625mm W X 2.90mm L X 1.00mm H body, IPC Medium Density", Part Description="Rail-to-Rail Output 215MHz, 1.1nV/√Hz Op Amp/SAR ADC Driver", Part Number=LT6236HS6#TRMPBF, Pin Count=6, Status=Active
IC3A IC3B IC5A IC5B: "Unity-Gain Stable, Ultralow Distortion, 1 nV/sqrt Hz Voltage Noise, High Speed Operational Amplifier", Case=SOIC8, Manufacturer="ANALOG DEVICES", Manufacturer Part Number=ADA4899-1YRD, Author="CERN DEM JLC", Bonding=No, Component Type=Standard, ComponentHeight=1.75mm, CreateDate=1/13/2010, Device=ADA4899-1YRDZ, HelpURL=\\cern.ch\dfs\Applications\Altium\Datasheets\ADA4899-1YRDZ.pdf, LatestRevisionDate=3/31/2022, Mounted=Yes, PackageDescription="SOIC, 1.27mm Pitch; 8 Pin, 3.90mm W X 4.90mm L X 1.75mm H body (w/Thermal Tab 2.29 X 2.29mm), IPC Medium Density", Part Description="Unity-Gain Stable, Ultralow Distortion, 1nV/sqrt Hz Voltage Noise, High Speed Operational Amplifier", Part Number=ADA4899-1YRDZ, Pin Count=9, PressFit=No, Sense=No, SMD=Yes, Socket=No
IC4A IC4B: "High Speed, ±0.1 µV/˚C Offset Drift, Fully Differential ADC Driver", Case=QFN, Manufacturer="Analog Devices", Author="Michal Beldyga", Component Type=Standard, CreateDate=1/31/2025, Device=ADA4945-1ACPZ-R2, LastRevision=1/31/2025, Manufacturer Part Number=ADA4945-1ACPZ-R2, PackageDescription="QFN, 16-Leads, Body 3.00x3.00mm, Pitch 0.50mm, Thermal Pad 1.60x1.60mm, IPC Medium Density", Part Description="High Speed, ±0.1 µV/˚C Offset Drift, Fully Differential ADC Driver", Part Number=ADA4945-1ACPZ-R2, Pin Count=17, Status=Active